# EAGLE board Plug_ATtiny13 (EAGLE 5.10)
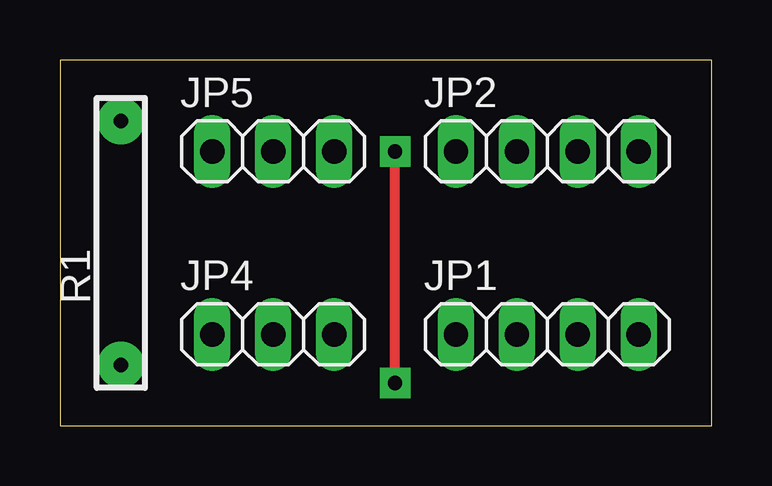
[diagram p0: board, top side]
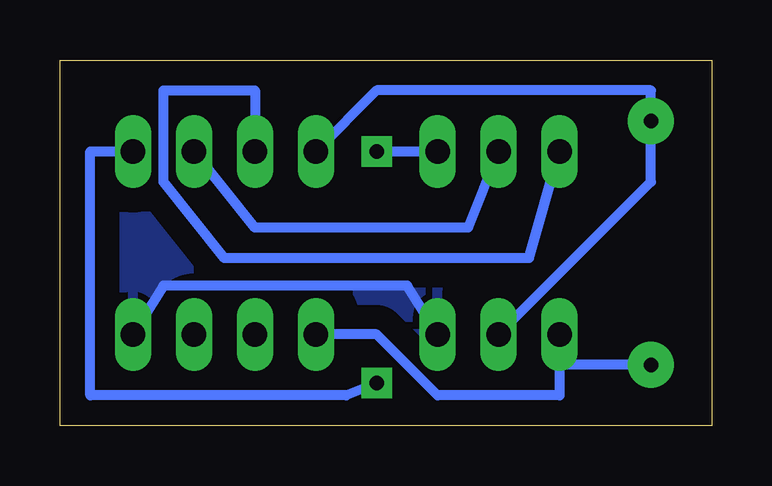
[diagram p1: board, bottom side, seen from below]

Size 27.18 x 15.24 mm. Coordinates in mm from the lower left corner, seen from the top.
Outline: 0,0 27.18,0 27.18,15.24 0,15.24 0,0
Copper layers (1*16): Top 0.035mm / dielectric 1.5mm / Bottom 0.035mm
Design rules "default": minimum track width 10mil, minimum drill 24mil, track to track 8mil, track to pad 8mil, pad to pad 8mil, via to via 8mil, smd to smd 8mil, copper to edge 40mil, drill to drill 8mil, minimum pad ring 10mil, minimum via ring 8mil, stop-mask expansion 4mil, vias tented up to drill 0mil, thermal gap 10mil

## Footprints (pad centres in the part's own frame; a part is rotated, then mirrored left to right if it is on the bottom)
1X04 = drill 1.016 long: 1 -3.81,0; 2 -1.27,0; 3 1.27,0; 4 3.81,0
1X03 = drill 1.016 long: 1 -2.54,0; 2 0,0; 3 2.54,0
R_0.125W_4 = drill 0.6 pad 1.93 round: 1 -5.08,0; 2 5.08,0

## Placement (x,y rotation side)
JP1  [1X04]  20.32,3.81 0 top
JP2  [1X04]  20.32,11.43 0 top
JP4  [1X03]  8.89,3.81 0 top
JP5  [1X03]  8.89,11.43 0 top
R1  10K  [R_0.125W_4]  2.54,7.62 90 top

## Library data of the parts
JP1 JP2 JP4 JP5 = pinheader
R1 = MyLib

## Nets
GND: JP1.4 JP4.3
N$1: JP1.1 JP4.1 R1.1
N$2: JP2.4 JP5.3
N$3: JP2.3 JP5.2
N$4: JP2.2 JP5.1
VCC: JP2.1 JP4.2 R1.2

## Tracks (layer width: path | path; a pad name or v marks a point on that pad's centre or on a via)
GND
  Bottom 0.406: JP4.3 12.7,5.84 22.86,5.84 JP1.4
  pour Bottom (isolate 1.016): 0,15.24 0,0 27.94,0 27.94,15.24
N$1
  Bottom 0.406: JP1.1 13.97,3.81 11.43,1.27 6.35,1.27 6.35,2.54 | R1.1 6.35,2.54 | 6.35,2.54 JP4.1
N$2  (via drill 0.6 pad 1.27)
  Top 0.406: v13.97,1.78 v13.97,11.43
  Bottom 0.406: JP2.4 25.91,11.43 25.91,1.27 15.24,1.27 v13.97,1.78 | v13.97,11.43 JP5.3
N$3
  Bottom 0.406: JP5.2 10.16,8.26 19.05,8.26 JP2.3
N$4
  Bottom 0.406: JP5.1 7.62,6.99 20.32,6.99 22.86,10.16 22.86,13.97 19.05,13.97 JP2.2
VCC
  Bottom 0.406: JP4.2 2.54,10.16 R1.2 2.54,13.97 13.97,13.97 JP2.1